# Altium PCB PCB_Rev1.1.PcbDoc (part 3 of 4)
Units mm, origin at the board's own origin, x right, y up, seen from the top; angles counter-clockwise.
Board outline 81.62 x 96.13 mm, 4 copper layers (Top Layer, GND, PWR, Bottom Layer), stack 1.49 mm thick; 185 components, 276 nets, 1052 pads, 353 vias.
Unrouted connection lines stored in the file: 133.
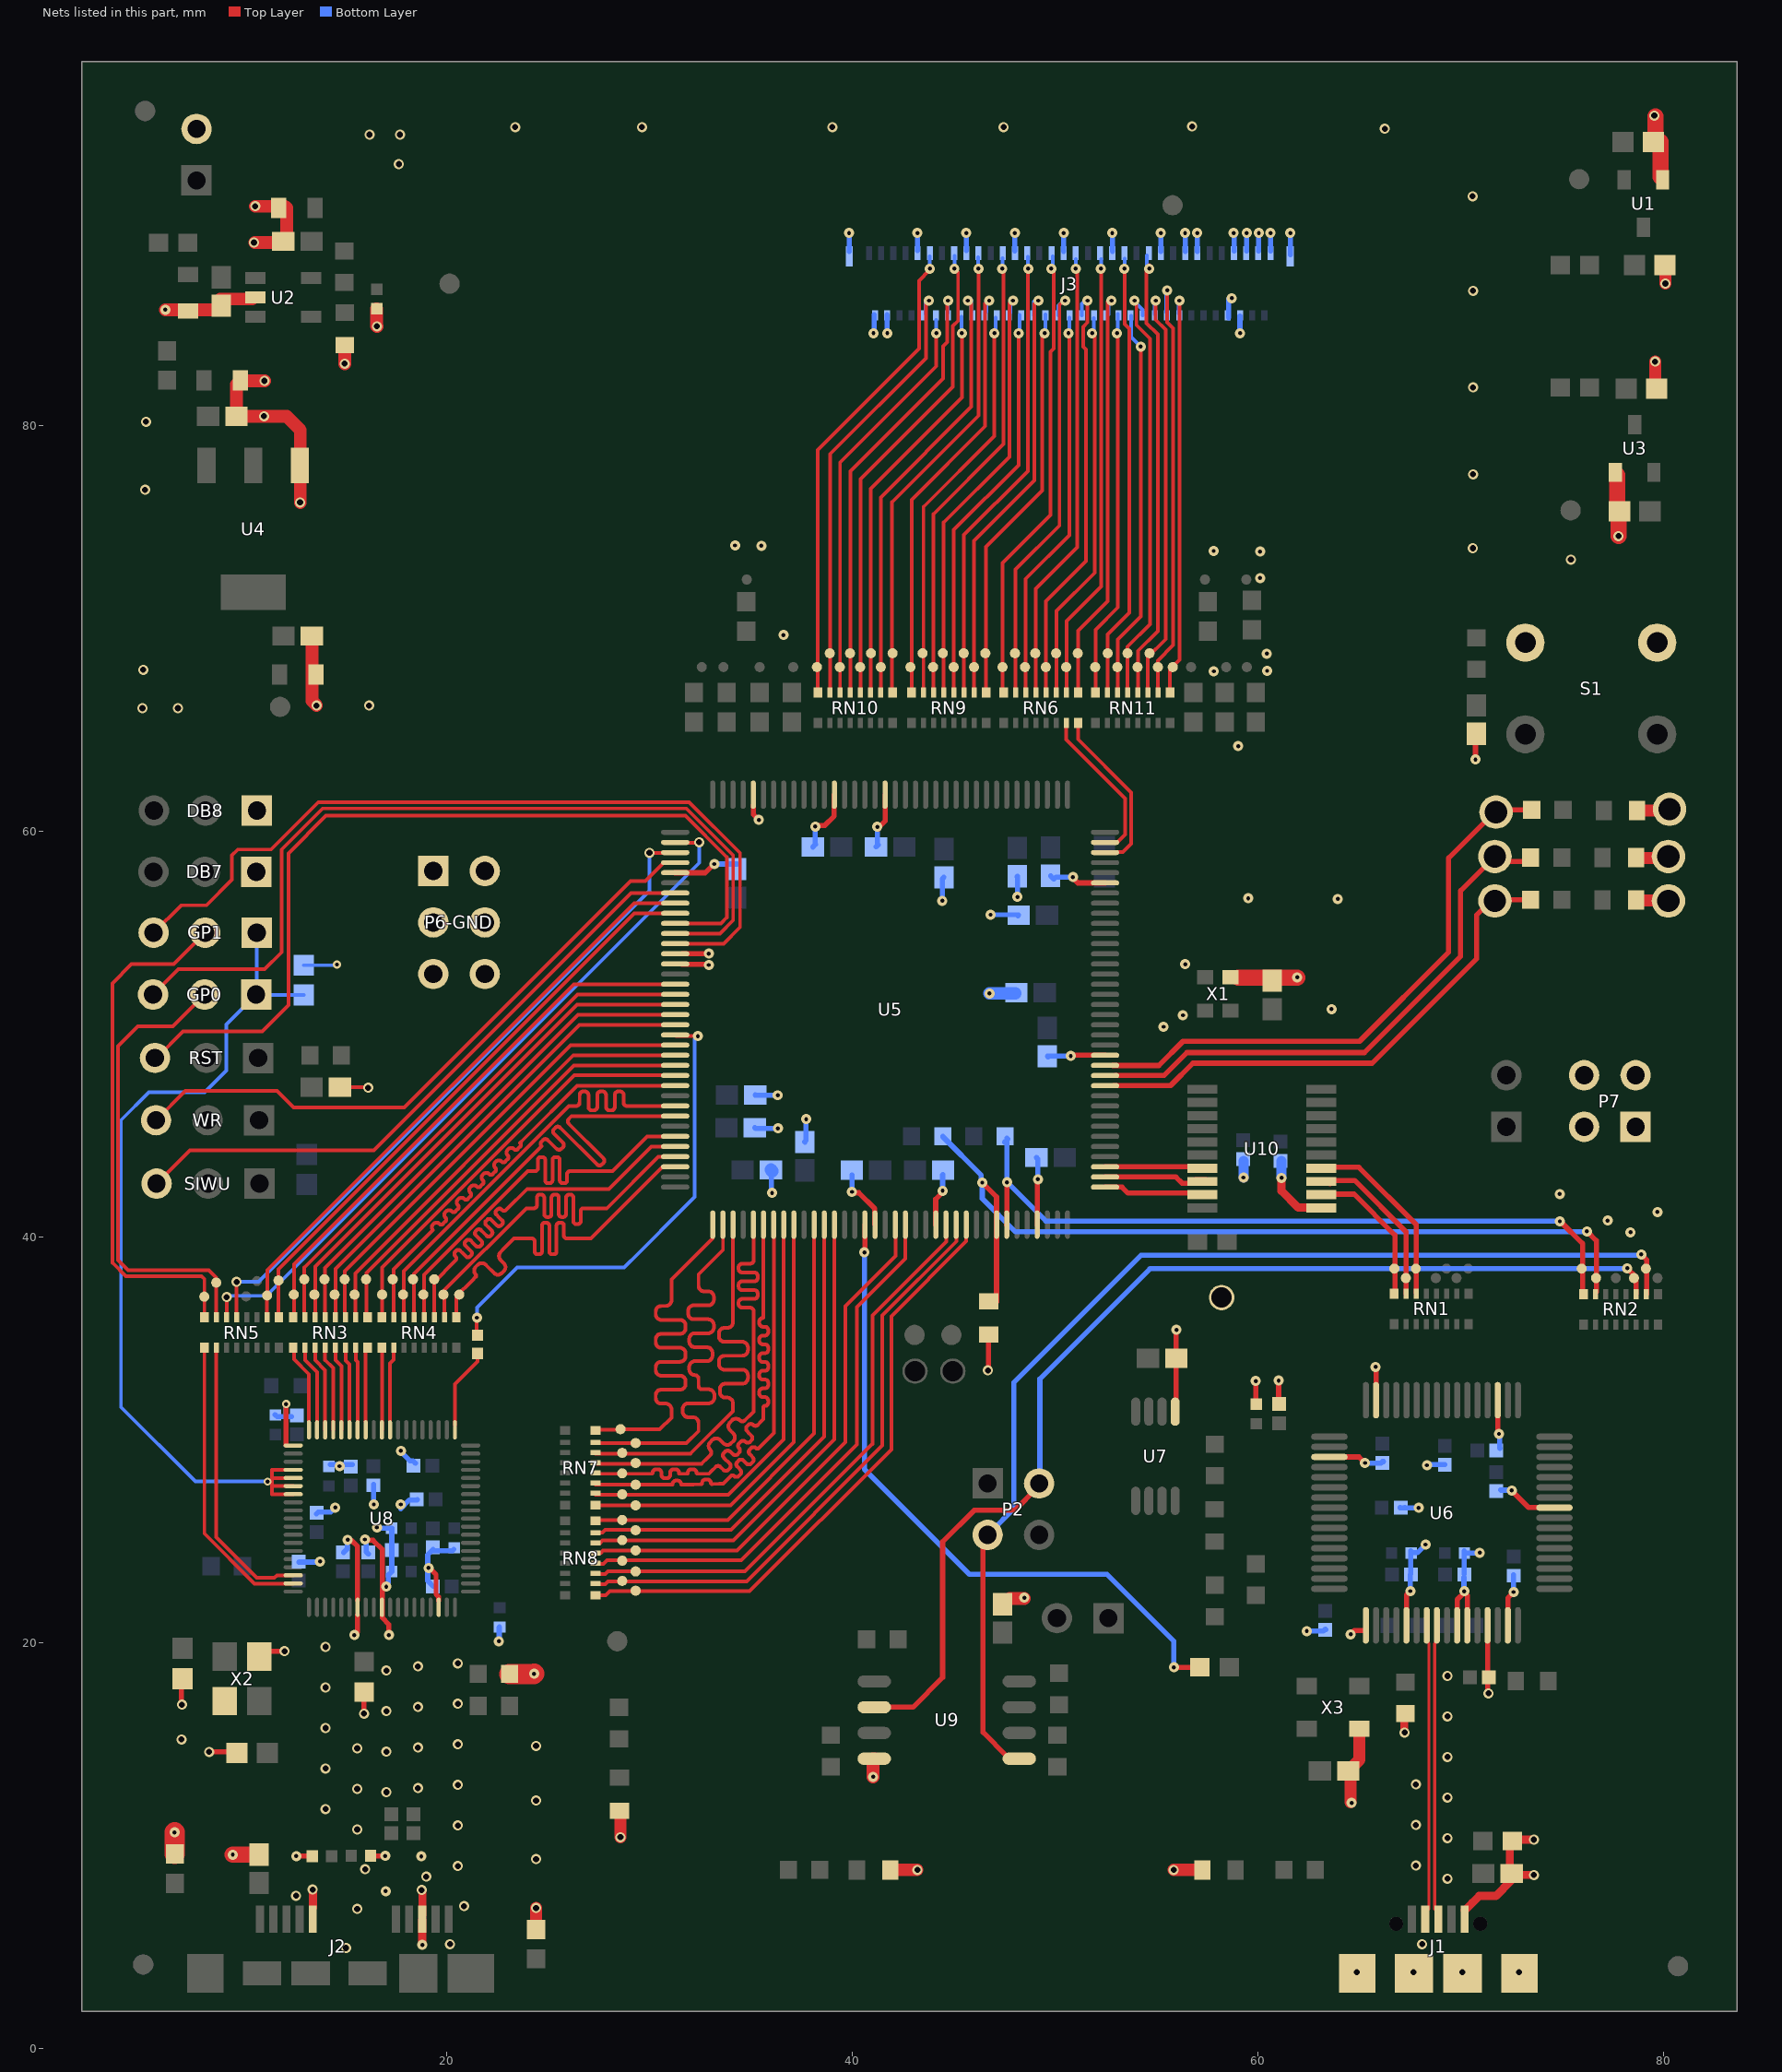
[diagram p4: the nets of this part, all layers, seen from the top]

## Via types
v1: diameter 0.5, hole 0.2, Top Layer to Bottom Layer, tented both sides, 238 vias
v2: diameter 0.5, hole 0.3, Top Layer to Bottom Layer, tented both sides, 106 vias
v3: diameter 0.4, hole 0.2, Top Layer to Bottom Layer, tented both sides, 5 vias
v4: diameter 0.6, hole 0.3, Top Layer to Bottom Layer, tented both sides, 2 vias
v5: diameter 1, hole 0.6, Top Layer to Bottom Layer, tented both sides, 1 vias
v6: diameter 0.3, hole 0.2, Top Layer to Bottom Layer, tented both sides, 1 vias

## Nets (pads, with @x,y where several pads share a name; then routed paths per layer and width w, separated by ;. In a path a pad name is that pad's centre, name@x,y a point inside that pad or via, vN(x,y) a via of type N, cw(c..) or ccw(c..) an arc to the next point about the centre after c; other vN are vias at no path point) (continued)
D22: RN4.2 U8.66 | length 4.1
  Top Layer w0.18: U8.66@17.188,30.486 17.188,33.766 17.373,33.951 RN4.2@17.373,34.529
D23: RN4.1 U8.67 | length 4
  Top Layer w0.18: U8.67@16.788,30.486 16.788,31.017 16.807,31.035 RN4.1@16.807,34.466
D24: RN3.8 U8.69 | length 3.6
  Top Layer w0.18: U8.69@15.976,30.907 RN3.8@15.976,34.462
D25: RN3.7 U8.70 | length 4.1
  Top Layer w0.18: RN3.7@15.5,34.529 15.5,33.928 15.588,33.84 U8.70@15.588,30.486
D26: RN3.6 U8.71 | length 4.1
  Top Layer w0.18: RN3.6@15,34.529 15,33.889 15.177,33.712 15.177,30.498 U8.71@15.188,30.486
D27: RN3.5 U8.72 | length 4.2
  Top Layer w0.18: RN3.5@14.5,34.529 14.5,33.916 14.788,33.628 U8.72@14.788,30.486
D28: RN3.4 U8.73 | length 4
  Top Layer w0.18: RN3.4@13.984,34.349 13.984,33.932 14.388,33.527 U8.73@14.388,30.486
D29: RN3.3 U8.74 | length 4.2
  Top Layer w0.18: RN3.3@13.5,34.529 13.5,33.916 13.988,33.428 U8.74@13.988,30.486
D30: RN3.2 U8.75 | length 4.3
  Top Layer w0.18: RN3.2@13,34.529 13,33.916 13.588,33.327 U8.75@13.588,30.486
D31: RN3.1 U8.76 | length 4.3
  Top Layer w0.18: RN3.1@12.457,34.466 12.457,33.959 13.188,33.228 U8.76@13.188,30.486
D\C\D\: U5.73 U10.9 | length 5.1
  Top Layer w0.254: U5.73@52.453,42.451 53.288,42.451 53.58,42.159 U10.9@57.432,42.159
D\S\R\: U5.74 U10.8 | length 5.2
  Top Layer w0.254: U5.74@52.453,42.951 55.946,42.951 56.256,42.641 56.751,42.641 56.92,42.809 U10.8@57.432,42.809
D\T\R\: U5.75 U10.7 | length 5
  Top Layer w0.254: U5.75@52.453,43.451 52.455,43.453 57.426,43.453 U10.7@57.432,43.459
D_N: J1.2 U6.7 | length 14.5
  Top Layer w0.15: J1.2@68.137,6.38 J1.2@68.137,6.385 ; J1.2@68.204,6.385 J1.2@68.204,6.86 ; U6.7@68.316,20.846 68.316,20.055 68.427,19.944 J1.2@68.427,6.848
D_P: J1.3 U6.8 | length 14.5
  Top Layer w0.15: J1.3@68.705,6.861 68.705,19.944 68.816,20.055 U6.8@68.816,20.846 ; J1.3@68.854,6.385 J1.3@68.854,6.86
DATA0: J3.57 pad.2@38.245,68.096 RN10.16 | length 23.9
  Top Layer w0.18: RN10.16@38.278,66.829 38.278,78.794 43.281,83.797 43.281,87.15 43.785,87.654 v1@43.785,87.896
  Bottom Layer w0.18: v1@43.805,87.784 J3.57@43.805,88.352
  other v1: 43.814,87.737
DATA1: J3.53 pad.2@40.376,68.096 RN10.12 | length 23.5
  Top Layer w0.18: RN10.12@40.394,66.829 40.394,77.361 44.951,81.918 44.951,84.911 45.203,85.162 45.203,87.567 v1@45.044,87.726
  Bottom Layer w0.18: v1@45.03,87.811 J3.53@45.03,88.379
  other v1: 45.022,87.737
DATA2: J3.49 pad.2@41.974,68.777 RN10.9 | length 23.2
  Top Layer w0.18: RN10.9@41.952,66.829 41.952,76.236 46.207,80.491 46.207,87.727 v1@46.204,87.73
  Bottom Layer w0.18: v1@46.197,87.731 J3.49@46.197,88.299
  other v1: 46.206,87.737
DATA3: J3.45 pad.2@43.973,68.096 RN9.14 | length 22.9
  Top Layer w0.18: RN9.14@43.998,66.829 43.998,75.641 47.425,79.068 ; 47.435,79.09 v1@47.435,87.718
  Bottom Layer w0.18: v1@47.397,87.684 J3.45@47.397,88.252
  other v1: 47.385,87.737
DATA4: J3.41 pad.2@45.481,68.777 RN9.11 | length 22.8
  Top Layer w0.18: RN9.11@45.498,66.829 45.498,74.609 48.649,77.76 v1@48.649,87.737
  Bottom Layer w0.18: v1@48.656,87.759 J3.41@48.656,88.327
  other v1: 48.662,87.737
DATA5: J3.37 pad.2@47.395,68.096 RN6.16 | length 22.5
  Top Layer w0.18: RN6.16@47.393,66.833 47.393,73.221 49.76,75.588 49.76,83.642 49.918,83.8 49.918,87.572 v1@49.805,87.685
  Bottom Layer w0.18: v1@49.875,87.783 J3.37@49.875,88.351
  other v1: 49.805,87.737
DATA6: J3.33 pad.2@49.013,68.777 RN6.13 | length 22.5
  Top Layer w0.18: RN6.13@49.037,66.833 49.037,71.948 51.089,74 51.089,87.786 v1@51,87.875
  Bottom Layer w0.18: v1@51.005,87.632 J3.33@51.005,88.2
  other v1: 51.005,87.737
DATA7: J3.29 pad.2@50.536,68.096 RN6.10 | length 22.1
  Top Layer w0.18: RN6.10@50.55,66.76 50.55,70.357 52.264,72.071 v1@52.264,87.632
  Bottom Layer w0.18: v1@52.265,87.632 J3.29@52.265,88.2
  other v1: 52.248,87.737
DATA7Res: RN6.7 U5.107 | length 7.3
  Top Layer w0.18: RN6.7@50.537,65.333 50.537,64.515 53.447,61.605 53.447,59.843 U5.107@53.037,59.433
DATA8: J3.25 pad.2@52.587,68.777 RN11.15 | length 22.2
  Top Layer w0.18: RN11.15@52.571,66.829 52.571,69.7 53.64,70.769 53.64,84.782 53.418,85.004 v1@53.418,87.899
  Bottom Layer w0.18: v1@53.423,87.656 J3.25@53.423,88.224
  other v1: 53.41,87.737
DATA9: J3.21 pad.2@54.052,68.096 RN11.12 | length 22.4
  Top Layer w0.18: RN11.12@54.071,66.829 54.071,68.891 55.053,69.873 55.053,84.499 54.494,85.058 54.494,87.618 54.637,87.761 v1@54.637,87.915
  Bottom Layer w0.18: v1@54.513,87.825 J3.21@54.513,88.393
  other v1: 54.637,87.737
DATA10: J3.16 pad.2@55.794,68.095 RN11.9 | length 20
  Top Layer w0.18: RN11.9@55.654,66.959 55.654,67.982 56.131,68.459 v1@56.131,86.151
  Bottom Layer w0.18: J3.16@56.085,85.534 v1@56.085,86.102
  other v1: 56.12,86.162
DATA11: J3.18 pad.2@55.057,68.096 RN11.10 | length 21.1
  Top Layer w0.18: RN11.10@55.051,66.959 55.051,68.414 55.815,69.178 55.815,84.806 55.518,85.103 v1(55.518,86.666)
  Bottom Layer w0.18: J3.18@55.463,85.586 v1@55.463,86.519
DATA12: J3.20 pad.2@54.646,68.777 RN11.11 | length 20.3
  Top Layer w0.18: RN11.11@54.562,66.936 54.562,68.589 55.439,69.466 55.439,84.735 54.955,85.219 v1@54.955,86.151
  Bottom Layer w0.18: J3.20@54.909,85.508 v1@54.909,86.076
  other v1: 54.955,86.162
DATA13: J3.22 pad.2@53.563,68.777 RN11.13 | length 20.9
  Top Layer w0.18: RN11.13@53.562,66.959 53.562,68.777 53.562,69.101 54.665,70.204 54.665,84.288 54.003,84.951 54.003,86.195 v1@53.902,86.296
  Bottom Layer w0.18: v1@53.969,86.058 54.31,85.717 J3.22@54.31,85.438
  other v1: 53.902,86.162
DATA14: J3.24 pad.2@53.065,68.096 RN11.14 | length 19.3
  Top Layer w0.18: RN11.14@53.071,66.829 53.071,69.444 54.211,70.584 v1(54.211,83.892)
  Bottom Layer w0.18: J3.24@53.742,85.425 53.742,84.361 v1(54.211,83.892)
DATA15: J3.26 pad.2@51.967,68.096 RN11.16 | length 19
  Top Layer w0.18: RN11.16@51.994,66.941 51.994,69.936 53.091,71.033 v1@53.091,84.555
  Bottom Layer w0.18: v1@53.074,84.555 J3.26@53.074,85.494
  other v1: 53.04,84.555
DATA16: J3.28 pad.2@51.108,68.777 RN6.9 | length 20.9
  Top Layer w0.18: RN6.9@51.133,66.8 51.133,69.888 52.58,71.335 52.58,86.109 v1@52.773,86.302
  Bottom Layer w0.18: J3.28@52.627,85.484 52.627,86.016 v1(52.773,86.162)
DATA16Res: RN6.8 U5.106 | length 8.1
  Top Layer w0.18: RN6.8@51.125,65.333 51.125,64.532 53.748,61.908 53.748,59.393 53.327,58.972 U5.106@52.849,58.972
DATA17: J3.30 pad.2@50.041,68.777 RN6.11 | length 19.3
  Top Layer w0.18: RN6.11@50.053,66.819 50.053,70.858 51.935,72.74 v1@51.935,84.555
  Bottom Layer w0.18: v1@51.904,84.555 J3.30@51.904,85.309
  other v1: 51.812,84.555
DATA18: J3.32 pad.2@49.53,68.096 RN6.12 | length 21.4
  Top Layer w0.18: RN6.12@49.537,66.833 49.537,71.339 51.52,73.322 51.52,83.748 51.371,83.897 51.371,84.871 51.583,85.083 v1@51.583,86.284
  Bottom Layer w0.18: J3.32@51.31,85.438 51.31,86.011 v1@51.583,86.284
  other v1: 51.583,86.162
DATA19: J3.34 pad.2@48.504,68.096 RN6.14 | length 19.4
  Top Layer w0.18: RN6.14@48.537,66.833 48.537,72.444 50.686,74.593 v1@50.686,84.555
  Bottom Layer w0.18: v1@50.693,84.555 J3.34@50.693,85.313
  other v1: 50.647,84.555
DATA20: J3.36 pad.2@48.013,68.777 RN6.15 | length 21.3
  Top Layer w0.18: RN6.15@48.037,66.833 48.037,72.905 50.205,75.073 50.205,85.958 v1@50.484,86.237
  Bottom Layer w0.18: J3.36@50.152,85.445 50.152,85.905 v1@50.484,86.237
  other v1: 50.484,86.162
DATA21: J3.38 pad.2@46.548,68.777 RN9.9 | length 19.9
  Top Layer w0.18: RN9.9@46.585,66.829 46.585,74.023 49.356,76.793 49.356,84.402 v1@49.509,84.555
  Bottom Layer w0.18: v1@49.508,84.555 J3.38@49.508,85.49
  other v1: 49.476,84.555
DATA22: J3.40 pad.2@45.995,68.096 RN9.10 | length 21.4
  Top Layer w0.18: RN9.10@45.998,66.829 45.998,74.326 48.968,77.296 48.968,86.012 v1@49.162,86.206
  Bottom Layer w0.18: J3.40@48.94,85.445 v1@48.94,86.124
  other v1: 49.162,86.162
DATA23: J3.42 pad.2@44.989,68.096 RN9.12 | length 19.9
  Top Layer w0.18: RN9.12@44.998,66.829 44.998,74.865 48.185,78.052 v1(48.185,84.555)
  Bottom Layer w0.18: v1@48.242,84.555 J3.42@48.242,85.45
DATA24: J3.44 pad.2@44.453,68.777 RN9.13 | length 21.4
  Top Layer w0.18: RN9.13@44.498,66.829 44.498,75.221 47.743,78.466 47.743,86.045 v1@47.91,86.212
  Bottom Layer w0.18: J3.44@47.779,85.575 v1@47.779,86.143
  other v1: 47.91,86.162
DATA25: J3.46 pad.2@43.453,68.777 RN9.15 | length 20
  Top Layer w0.18: RN9.15@43.498,66.829 43.498,75.991 46.993,79.486 v1(46.993,84.555)
  Bottom Layer w0.18: v1@47.047,84.533 J3.46@47.047,85.326
DATA26: J3.48 pad.2@42.855,68.096 RN9.16 | length 21.6
  Top Layer w0.18: RN9.16@42.911,66.829 42.911,76.343 46.544,79.977 46.544,86.034 v1@46.738,86.228
  Bottom Layer w0.18: J3.48@46.599,85.627 v1@46.599,86.195
  other v1: 46.738,86.162
DATA27: J3.50 pad.2@41.392,68.096 RN10.10 | length 21.7
  Top Layer w0.18: RN10.10@41.386,66.995 41.386,76.462 45.85,80.926 45.85,86.025 v1@45.69,86.185
  Bottom Layer w0.18: J3.50@45.842,85.621 v1@45.842,86.189
  other v1: 45.69,86.162
DATA28: J3.52 pad.2@40.907,68.777 RN10.11 | length 20.4
  Top Layer w0.18: RN10.11@40.898,66.829 40.898,76.894 45.393,81.389 v1(45.393,84.555)
  Bottom Layer w0.18: v1@45.38,84.559 J3.52@45.38,85.361
DATA29: J3.54 pad.2@39.879,68.777 RN10.13 | length 21.9
  Top Layer w0.18: RN10.13@39.889,66.829 39.889,77.756 44.463,82.33 44.463,83.903 44.67,84.11 44.67,86.109 v1@44.72,86.159
  Bottom Layer w0.18: J3.54@44.699,85.544 v1@44.699,86.112
  other v1: 44.709,86.162
DATA30: J3.56 pad.2@39.37,68.096 RN10.14 | length 20.2
  Top Layer w0.18: RN10.14@39.386,66.829 39.384,78.189 44.118,82.923 v1@44.118,84.523
  Bottom Layer w0.18: v1@44.134,84.641 J3.56@44.134,85.209
  other v1: 44.131,84.555
DATA31: J3.58 pad.2@38.879,68.777 RN10.15 | length 21.9
  Top Layer w0.18: RN10.15@38.887,66.829 38.887,78.603 43.615,83.331 43.615,85.997 v1@43.765,86.147
  Bottom Layer w0.18: J3.58@43.593,85.527 v1@43.593,86.095
  other v1: 43.765,86.162
DCDRN: pad.2@66.719,38.433 RN1.16 U10.12 | length 6.6
  Top Layer w0.254: U10.12@63.853,42.104 64.736,42.104 66.749,40.091 RN1.16@66.749,37.204
DSR_RN: pad.2@67.287,37.97 RN1.15 U10.13 | length 7.9
  Top Layer w0.254: U10.13@63.554,42.624 63.715,42.785 64.766,42.785 67.301,40.25 RN1.15@67.301,37.172
DTRRN: pad.2@67.78,38.433 RN1.14 U10.14 | length 8.7
  Top Layer w0.254: U10.14@63.681,43.432 64.972,43.432 67.8,40.604 RN1.14@67.8,37.236
FIFO_CLK: R4.2 U5.21 | length 23.5
  Top Layer w0.18: R4.2@21.467,35.18 v1@21.467,36.008 ; U5.21@31.253,49.939 31.294,49.898 v1(32.372,49.898)
  Top Layer w0.254: R4.2@21.461,35.174 R4.2@21.467,35.18 ; v1@21.467,36.008 v1(21.472,36.013)
  Bottom Layer w0.18: v1(21.472,36.013) 21.472,36.504 23.458,38.49 28.202,38.49 28.743,38.49 29.472,39.218 31.558,41.305 32.221,41.967 32.221,49.747 v1(32.372,49.898)
FIFO_D0: pad.2@29.302,22.551 RN8.9 U5.62 | length 29.6
  Top Layer w0.18: RN8.9@27.331,22.33 27.829,22.33 28.028,22.528 34.925,22.528 41.909,29.512 41.909,36.084 45.607,39.782 U5.62@45.607,40
FIFO_D1: pad.2@28.638,23.037 RN8.10 U5.61 | length 28.6
  Top Layer w0.18: RN8.10@27.548,22.881 27.804,22.881 27.931,23.008 34.776,23.008 41.474,29.706 41.474,36.131 45.118,39.775 U5.61@45.118,40.032
FIFO_D2: pad.2@29.302,23.501 RN8.11 U5.60 | length 27.9
  Top Layer w0.18: RN8.11@27.542,23.376 27.799,23.376 27.934,23.511 34.692,23.511 40.971,29.79 ; 40.977,29.783 40.977,36.118 44.616,39.757 U5.60@44.616,40.074
FIFO_D3: pad.2@28.638,24.032 RN8.12 U5.56 | length 26.5
  Top Layer w0.18: RN8.12@27.513,23.883 27.711,23.883 27.887,24.059 34.515,24.059 40.21,29.754 40.21,36.532 42.596,38.918 U5.56@42.596,40.139
FIFO_D4: pad.2@29.302,24.542 RN8.13 U5.55 | length 25.8
  Top Layer w0.18: RN8.13@27.331,24.417 27.587,24.417 27.694,24.524 34.297,24.524 39.64,29.867 39.64,36.578 42.117,39.055 U5.55@42.117,40.12
FIFO_D5: pad.2@28.638,25.046 RN8.14 U5.49 | length 24.3
  Top Layer w0.18: RN8.14@27.542,24.896 27.674,25.028 34.118,25.028 39.103,30.014 U5.49@39.103,40.601
FIFO_D6: pad.2@29.302,25.538 RN8.15 U5.48 | length 23.7
  Top Layer w0.18: RN8.15@27.331,25.417 27.667,25.417 27.801,25.551 34.012,25.551 38.603,30.142 U5.48@38.603,40.601
FIFO_D7: pad.2@28.638,26.042 RN8.16 U5.47 | length 22.8
  Top Layer w0.18: RN8.16@27.331,26.039 pad.2@28.638,26.042 33.847,26.042 38.103,30.298 U5.47@38.103,40.601
FIFO_D8: pad.2@29.302,26.763 RN7.9 U5.45 | length 21.6
  Top Layer w0.18: RN7.9@27.483,26.761 33.992,26.761 37.103,29.872 U5.45@37.103,40.601
FIFO_D9: pad.2@28.638,27.306 RN7.10 U5.44 | length 21
  Top Layer w0.18: RN7.10@27.331,27.293 33.877,27.293 36.603,30.019 U5.44@36.603,40.601
FIFO_D10: pad.2@29.302,27.777 RN7.11 U5.43 | length 22.1
  Top Layer w0.18: RN7.11@27.325,27.82 27.314,27.791 pad.2@29.285,27.787 ; pad.2@29.302,27.785 30.898,27.782 31.092,27.782 ccw(c31.092,27.805) 31.115,27.805 cw(c31.289,27.805) 31.289,27.979 31.375,27.979 cw(c31.375,27.805) 31.549,27.805 ccw(c31.572,27.805) 31.572,27.782 31.931,27.782 32.148,27.788 32.526,27.798 ccw(c32.524,27.854) 32.58,27.855 cw(c32.754,27.86) 32.749,28.033 32.836,28.035 cw(c32.841,27.862) 33.014,27.866 ccw(c33.07,27.868) 33.072,27.812 33.449,27.822 33.618,27.826 33.772,27.98 34.004,28.212 cw(c34.078,28.138) 34.153,28.212 ccw(c34.275,28.335) 34.398,28.212 34.46,28.274 ccw(c34.337,28.396) 34.46,28.519 34.385,28.593 34.317,28.662 cw(c34.439,28.785) 34.317,28.908 34.378,28.969 cw(c34.501,28.846) 34.623,28.969 34.692,28.9 34.766,28.826 ccw(c34.889,28.949) 35.012,28.826 35.073,28.887 ccw(c34.951,29.01) 35.073,29.133 34.999,29.207 34.93,29.276 cw(c35.053,29.399) 34.93,29.521 34.992,29.583 ; 34.992,29.583 cw(c35.115,29.46) 35.237,29.583 ; 35.237,29.583 ccw(c35.306,29.651) 35.375,29.583 35.613,29.821 35.668,29.876 36.126,30.334 36.126,40.578 U5.43@36.103,40.601
FIFO_D11: pad.2@28.638,28.342 RN7.12 U5.42 | length 25.4
  Top Layer w0.18: RN7.12@27.331,28.317 29.921,28.317 30.093,28.317 ccw(c30.093,28.362) 30.138,28.362 cw(c30.312,28.362) 30.312,28.535 30.398,28.535 cw(c30.398,28.362) 30.572,28.362 30.572,28.317 30.572,28.275 ccw(c30.746,28.275) 30.746,28.102 30.832,28.102 ccw(c30.832,28.275) 31.006,28.275 31.006,28.317 31.006,28.362 cw(c31.18,28.362) 31.18,28.535 31.266,28.535 cw(c31.266,28.362) 31.44,28.362 ccw(c31.485,28.362) 31.485,28.317 31.829,28.317 ccw(c31.829,28.362) 31.874,28.362 cw(c32.048,28.362) 32.048,28.535 32.134,28.535 cw(c32.134,28.362) 32.308,28.362 ccw(c32.353,28.362) 32.353,28.317 32.742,28.317 32.909,28.317 33.062,28.47 33.247,28.655 cw(c33.369,28.532) 33.492,28.655 33.632,28.514 ccw(c33.755,28.637) 33.878,28.514 33.939,28.576 ccw(c33.817,28.698) 33.939,28.821 33.676,29.084 33.657,29.104 cw(c33.779,29.227) 33.657,29.349 33.718,29.411 cw(c33.841,29.288) 33.964,29.411 33.983,29.391 34.091,29.283 ccw(c34.214,29.406) 34.337,29.283 34.398,29.344 ccw(c34.275,29.467) 34.398,29.59 cw(c34.506,29.698) 34.398,29.806 34.489,29.897 cw(c34.597,29.789) 34.705,29.897 ccw(c34.828,30.02) 34.95,29.897 35.012,29.958 ccw(c34.889,30.081) 35.012,30.204 34.904,30.312 34.798,30.417 cw(c34.921,30.54) 34.798,30.663 34.86,30.724 cw(c34.982,30.601) 35.105,30.724 ccw(c35.211,30.829) 35.316,30.724 35.518,30.926 35.603,31.011 35.603,31.228 35.603,31.594 cw(c35.671,31.594) 35.671,31.662 ccw(c35.671,31.836) 35.845,31.836 35.845,31.922 ccw(c35.671,31.922) 35.671,32.096 35.603,32.096 35.575,32.096 cw(c35.575,32.27) 35.402,32.27 35.402,32.356 cw(c35.575,32.356) 35.575,32.53 35.603,32.53 35.671,32.53 ccw(c35.671,32.704) 35.845,32.704 35.845,32.79 ccw(c35.671,32.79) 35.671,32.964 35.603,32.964 35.575,32.964 cw(c35.575,33.138) 35.402,33.138 35.402,33.224 cw(c35.575,33.224) 35.575,33.398 35.603,33.398 35.671,33.398 ccw(c35.671,33.572) 35.845,33.572 35.845,33.658 ccw(c35.671,33.658) 35.671,33.832 35.603,33.832 35.575,33.832 cw(c35.575,34.006) 35.402,34.006 35.402,34.092 cw(c35.575,34.092) 35.575,34.266 35.603,34.266 35.671,34.266 ccw(c35.671,34.44) 35.845,34.44 35.845,34.526 ccw(c35.671,34.526) 35.671,34.7 35.603,34.7 35.575,34.7 cw(c35.575,34.874) 35.402,34.874 35.402,34.96 cw(c35.575,34.96) 35.575,35.134 35.603,35.134 35.671,35.134 ccw(c35.671,35.308) 35.845,35.308 35.845,35.394 ccw(c35.671,35.394) 35.671,35.568 35.603,35.568 35.575,35.568 cw(c35.575,35.742) 35.402,35.742 35.402,35.828 cw(c35.575,35.828) 35.575,36.002 ccw(c35.575,36.03) 35.603,36.03 35.603,36.1 U5.42@35.603,40.601
FIFO_D12: pad.2@29.302,28.847 RN7.13 U5.41 | length 23.5
  Top Layer w0.18: RN7.13@27.331,28.817 32.557,28.817 32.866,29.126 32.983,29.243 ccw(c32.857,29.369) 32.983,29.496 cw(c33.178,29.69) 32.983,29.885 33.08,29.982 cw(c33.275,29.787) 33.469,29.982 33.596,29.856 33.628,29.823 ccw(c33.823,30.018) 34.017,29.823 34.115,29.921 ccw(c33.92,30.115) 34.115,30.31 34.082,30.342 33.956,30.469 cw(c34.151,30.663) 33.956,30.858 34.053,30.955 cw(c34.248,30.76) 34.442,30.955 ccw(c34.569,31.081) 34.695,30.955 35.055,31.315 35.12,31.38 35.12,31.724 35.12,31.858 35.12,36.284 35.12,36.333 ccw(c34.946,36.333) 34.946,36.507 34.555,36.507 cw(c34.555,36.681) 34.382,36.681 34.382,36.767 cw(c34.555,36.767) 34.555,36.941 35.12,36.941 35.148,36.941 ccw(c35.148,37.115) 35.321,37.115 35.321,37.201 ccw(c35.148,37.201) 35.148,37.375 35.12,37.375 34.555,37.375 cw(c34.555,37.549) 34.382,37.549 34.382,37.635 cw(c34.555,37.635) 34.555,37.809 35.12,37.809 35.148,37.809 ccw(c35.148,37.983) 35.321,37.983 35.321,38.069 ccw(c35.148,38.069) 35.148,38.243 35.12,38.243 34.555,38.243 cw(c34.555,38.417) 34.382,38.417 34.382,38.503 cw(c34.555,38.503) 34.555,38.677 34.946,38.677 ccw(c34.946,38.851) 35.12,38.851 35.12,39.111 35.12,39.328 U5.41@35.12,40.051
FIFO_D13: pad.2@28.638,29.347 RN7.14 U5.39 | length 21.8
  Top Layer w0.18: RN7.14@27.331,29.317 32.017,29.317 34.1,31.4 34.1,31.729 34.1,31.798 ccw(c33.825,31.798) 33.825,32.073 33.729,32.073 cw(c33.729,32.348) 33.454,32.348 33.454,32.486 cw(c33.729,32.486) 33.729,32.761 34.1,32.761 34.563,32.761 ccw(c34.563,33.036) 34.838,33.036 34.838,33.174 ccw(c34.563,33.174) 34.563,33.449 34.1,33.449 33.685,33.449 cw(c33.685,33.724) 33.41,33.724 33.41,33.862 cw(c33.685,33.862) 33.685,34.137 34.1,34.137 34.563,34.137 ccw(c34.563,34.412) 34.838,34.412 34.838,34.55 ccw(c34.563,34.55) 34.563,34.825 34.1,34.825 33.685,34.825 cw(c33.685,35.1) 33.41,35.1 33.41,35.238 cw(c33.685,35.238) 33.685,35.513 33.825,35.513 ccw(c33.825,35.788) 34.1,35.788 34.1,36.201 U5.39@34.1,39.992
FIFO_D14: pad.2@29.302,29.833 RN7.15 U5.38 | length 23.3
  Top Layer w0.18: RN7.15@27.531,29.829 27.535,29.825 31.803,29.825 32.405,30.427 32.405,30.76 32.405,30.829 ccw(c32.13,30.829) 32.13,31.104 31.9,31.104 cw(c31.9,31.379) 31.625,31.379 31.625,31.517 cw(c31.9,31.517) 31.9,31.792 32.405,31.792 32.91,31.792 ccw(c32.91,32.067) 33.185,32.067 33.185,32.205 ccw(c32.91,32.205) 32.91,32.48 32.574,32.48 cw(c32.574,32.649) 32.405,32.649 32.405,32.839 32.405,33 ccw(c32.222,33) 32.222,33.183 cw(c32.222,33.458) 31.947,33.458 31.947,33.596 cw(c32.222,33.596) 32.222,33.871 32.405,33.871 32.815,33.871 ccw(c32.815,34.146) 33.09,34.146 33.09,34.284 ccw(c32.815,34.284) 32.815,34.559 32.405,34.559 32.222,34.559 cw(c32.222,34.834) 31.947,34.834 31.947,34.972 cw(c32.222,34.972) 32.222,35.247 32.405,35.247 32.883,35.247 ccw(c32.883,35.522) 33.158,35.522 33.158,35.66 ccw(c32.883,35.66) 32.883,35.935 32.405,35.935 32.169,35.935 cw(c32.169,36.21) 31.893,36.21 31.893,36.348 cw(c32.169,36.348) 32.169,36.623 32.405,36.623 32.883,36.623 ccw(c32.883,36.898) 33.158,36.898 33.158,37.036 ccw(c32.883,37.036) 32.883,37.311 32.68,37.311 cw(c32.68,37.586) 32.405,37.586 32.405,37.627 32.405,38.14 33.61,39.345 U5.38@33.61,40.028
FIFO_D15: pad.2@28.559,30.519 RN7.16 U5.37 | length 22
  Top Layer w0.18: RN7.16@27.404,30.433 27.46,30.489 pad.2@28.559,30.489 ; pad.2@28.649,30.51 30.491,30.51 31.07,31.089 31.07,31.433 31.07,31.502 ccw(c30.795,31.502) 30.795,31.777 30.565,31.777 cw(c30.565,32.052) 30.29,32.052 30.29,32.19 cw(c30.565,32.19) 30.565,32.465 31.07,32.465 31.489,32.465 ccw(c31.489,32.74) 31.764,32.74 31.764,32.878 ccw(c31.489,32.878) 31.489,33.153 31.07,33.153 30.565,33.153 cw(c30.565,33.428) 30.29,33.428 30.29,33.566 cw(c30.565,33.566) 30.565,33.841 31.07,33.841 31.489,33.841 ccw(c31.489,34.116) 31.764,34.116 31.764,34.254 ccw(c31.489,34.254) 31.489,34.529 31.07,34.529 30.565,34.529 cw(c30.565,34.804) 30.29,34.804 30.29,34.942 cw(c30.565,34.942) 30.565,35.217 31.07,35.217 31.489,35.217 ccw(c31.489,35.492) 31.764,35.492 31.764,35.63 ccw(c31.489,35.63) 31.489,35.905 31.07,35.905 30.565,35.905 cw(c30.565,36.18) 30.29,36.18 30.29,36.318 cw(c30.565,36.318) 30.565,36.593 30.795,36.593 ccw(c30.795,36.868) 31.07,36.868 31.07,37.117 31.07,37.894 U5.37@33.093,39.917
FIFO_D16: pad.2@20.604,37.153 RN4.9 U5.34 | length 21.1
  Top Layer w0.18: RN4.9@20.461,36.029 20.461,37.073 21.229,37.841 21.42,38.032 ccw(c21.368,38.084) 21.42,38.137 cw(c21.615,38.331) 21.42,38.526 21.517,38.623 cw(c21.712,38.428) 21.906,38.623 21.959,38.571 22.316,38.214 ccw(c22.51,38.408) 22.705,38.214 22.802,38.311 ccw(c22.608,38.506) 22.802,38.7 22.64,38.863 cw(c22.834,39.057) 22.64,39.252 22.807,39.419 23.307,39.919 23.782,39.919 23.962,39.919 24.178,39.919 cw(c24.178,39.775) 24.322,39.775 24.322,39.283 ccw(c24.466,39.283) 24.466,39.139 24.538,39.139 ccw(c24.538,39.283) 24.682,39.283 24.682,39.919 24.682,40.555 cw(c24.826,40.555) 24.826,40.699 24.898,40.699 cw(c24.898,40.555) 25.042,40.555 25.042,39.919 25.042,39.283 ccw(c25.186,39.283) 25.186,39.139 25.258,39.139 ccw(c25.258,39.283) 25.402,39.283 25.402,39.919 25.402,40.555 cw(c25.546,40.555) 25.546,40.699 25.618,40.699 cw(c25.618,40.555) 25.762,40.555 25.762,40.063 ccw(c25.906,40.063) 25.906,39.919 25.986,39.919 27.101,39.919 U5.34@30.625,43.443
FIFO_D17: pad.2@19.821,37.153 RN4.10 U5.33 | length 21.9
  Top Layer w0.18: RN4.10@19.873,36.029 19.873,37.377 23.905,41.409 24.252,41.409 24.288,41.409 ccw(c24.288,41.553) 24.432,41.553 24.432,41.936 cw(c24.576,41.936) 24.576,42.08 24.648,42.08 cw(c24.648,41.936) 24.792,41.936 24.792,41.409 24.792,41.123 ccw(c24.936,41.123) 24.936,40.979 25.008,40.979 ccw(c25.008,41.123) 25.152,41.123 25.152,41.409 25.152,41.936 cw(c25.296,41.936) 25.296,42.08 25.368,42.08 cw(c25.368,41.936) 25.512,41.936 25.512,41.409 25.512,41.123 ccw(c25.656,41.123) 25.656,40.979 25.728,40.979 ccw(c25.728,41.123) 25.872,41.123 25.872,41.409 25.872,41.936 cw(c26.016,41.936) 26.016,42.08 26.088,42.08 cw(c26.088,41.936) 26.232,41.936 26.232,41.409 26.232,40.773 ccw(c26.376,40.773) 26.376,40.629 26.448,40.629 ccw(c26.448,40.773) 26.592,40.773 26.592,41.265 cw(c26.736,41.265) 26.736,41.409 26.768,41.409 27.882,41.409 30.424,43.951 U5.33@31.253,43.951
FIFO_D18: pad.2@19.369,37.907 RN4.11 U5.32 | length 21.3
  Top Layer w0.18: RN4.11@19.359,36.029 19.359,37.772 20.395,38.808 20.42,38.833 ccw(c20.319,38.935) 20.42,39.037 20.398,39.059 cw(c20.5,39.161) 20.398,39.263 20.449,39.314 cw(c20.551,39.212) 20.653,39.314 20.777,39.19 20.93,39.036 ccw(c21.032,39.138) 21.134,39.036 21.185,39.087 ccw(c21.083,39.189) 21.185,39.291 21.031,39.444 20.907,39.569 cw(c21.009,39.67) 20.907,39.772 20.958,39.823 cw(c21.06,39.721) 21.162,39.823 21.286,39.699 21.44,39.545 ccw(c21.541,39.647) 21.643,39.545 21.694,39.596 ccw(c21.592,39.698) 21.694,39.8 21.541,39.954 21.416,40.078 cw(c21.518,40.18) 21.416,40.281 21.467,40.332 cw(c21.569,40.23) 21.671,40.332 21.795,40.208 21.949,40.054 ccw(c22.05,40.156) 22.152,40.054 22.203,40.105 ccw(c22.101,40.207) 22.203,40.309 22.05,40.463 21.925,40.587 cw(c22.027,40.689) 21.925,40.79 21.976,40.841 cw(c22.078,40.74) 22.18,40.841 22.304,40.717 22.458,40.564 ccw(c22.56,40.665) 22.661,40.564 22.712,40.615 ccw(c22.61,40.716) 22.712,40.818 22.559,40.972 22.435,41.096 cw(c22.536,41.198) 22.435,41.3 22.485,41.351 cw(c22.587,41.249) 22.689,41.351 22.711,41.328 ccw(c22.813,41.43) 22.915,41.328 22.922,41.335 23.949,42.362 27.985,42.362 30.074,44.451 U5.32@31.253,44.451
FIFO_D19: pad.2@18.831,37.153 RN4.12 U5.31 | length 21.3
  Top Layer w0.18: RN4.12@18.873,36.029 18.873,38.137 23.978,43.241 24.301,43.241 24.337,43.241 ccw(c24.337,43.385) 24.481,43.385 24.481,43.787 cw(c24.625,43.787) 24.625,43.931 24.697,43.931 cw(c24.697,43.787) 24.841,43.787 24.841,43.241 24.841,42.788 ccw(c24.985,42.788) 24.985,42.644 25.057,42.644 ccw(c25.057,42.788) 25.201,42.788 25.201,43.241 25.201,43.787 cw(c25.345,43.787) 25.345,43.931 25.417,43.931 cw(c25.417,43.787) 25.561,43.787 25.561,43.241 25.561,42.788 ccw(c25.705,42.788) 25.705,42.644 25.777,42.644 ccw(c25.777,42.788) 25.921,42.788 25.921,43.097 cw(c26.065,43.097) 26.065,43.241 26.157,43.241 28.169,43.241 29.875,44.947 U5.31@30.706,44.947
FIFO_D20: pad.2@18.322,37.907 RN4.13 U5.29 | length 25.3
  Top Layer w0.18: RN4.13@18.359,36.029 18.359,38.168 24.506,44.315 24.66,44.469 cw(c24.776,44.585) 24.66,44.701 24.735,44.776 cw(c24.851,44.66) 24.967,44.776 25.398,44.344 ccw(c25.521,44.467) 25.644,44.344 25.705,44.406 ccw(c25.582,44.528) 25.705,44.651 25.274,45.083 cw(c25.39,45.199) 25.274,45.315 25.349,45.39 cw(c25.465,45.274) 25.581,45.39 27.397,43.573 ccw(c27.52,43.696) 27.642,43.573 27.704,43.635 ccw(c27.581,43.758) 27.704,43.88 26.01,45.574 cw(c26.133,45.696) 26.01,45.819 26.035,45.844 26.142,45.951 U5.29@31.253,45.951
FIFO_D21: pad.2@17.832,37.153 RN4.14 U5.28 | length 23.3
  Top Layer w0.18: RN4.14@17.873,36.029 17.873,37.153 17.873,38.312 23.988,44.427 26.012,46.451 26.322,46.451 26.365,46.451 ccw(c26.365,46.625) 26.539,46.625 26.539,46.995 cw(c26.713,46.995) 26.713,47.168 26.799,47.168 cw(c26.799,46.995) 26.973,46.995 26.973,46.451 26.973,46.406 ccw(c27.147,46.406) 27.147,46.233 27.233,46.233 ccw(c27.233,46.406) 27.407,46.406 27.407,46.451 27.407,46.995 cw(c27.581,46.995) 27.581,47.168 27.667,47.168 cw(c27.667,46.995) 27.841,46.995 27.841,46.451 27.841,46.406 ccw(c28.015,46.406) 28.015,46.233 28.101,46.233 ccw(c28.101,46.406) 28.275,46.406 28.275,46.451 28.275,46.995 cw(c28.449,46.995) 28.449,47.168 28.535,47.168 cw(c28.535,46.995) 28.709,46.995 28.709,46.625 ccw(c28.883,46.625) 28.883,46.451 28.889,46.451 U5.28@31.253,46.451
FIFO_D22: pad.2@17.321,37.907 RN4.15 U5.26 | length 22.6
  Top Layer w0.18: RN4.15@17.373,36.029 17.373,38.406 19.153,40.186 19.306,40.339 cw(c19.437,40.47) 19.306,40.6 19.353,40.646 cw(c19.483,40.516) 19.613,40.646 ccw(c19.711,40.744) 19.809,40.646 19.92,40.757 ccw(c19.822,40.855) 19.92,40.953 cw(c20.051,41.084) 19.92,41.214 19.966,41.26 cw(c20.097,41.13) 20.227,41.26 ccw(c20.325,41.358) 20.423,41.26 20.534,41.371 ccw(c20.436,41.469) 20.534,41.567 cw(c20.664,41.697) 20.534,41.828 20.58,41.874 cw(c20.71,41.743) 20.841,41.874 ccw(c20.939,41.972) 21.037,41.874 21.148,41.985 ccw(c21.05,42.083) 21.148,42.181 cw(c21.278,42.311) 21.148,42.442 21.194,42.488 cw(c21.324,42.357) 21.455,42.488 ccw(c21.553,42.586) 21.65,42.488 21.762,42.599 ccw(c21.664,42.697) 21.762,42.795 cw(c21.892,42.925) 21.762,43.055 21.808,43.101 cw(c21.938,42.971) 22.068,43.101 ccw(c22.166,43.199) 22.264,43.101 22.375,43.212 ccw(c22.277,43.31) 22.375,43.408 cw(c22.506,43.539) 22.375,43.669 22.421,43.715 cw(c22.552,43.585) 22.682,43.715 ccw(c22.78,43.813) 22.878,43.715 22.989,43.826 ccw(c22.891,43.924) 22.989,44.022 cw(c23.119,44.152) 22.989,44.283 23.035,44.329 cw(c23.166,44.199) 23.296,44.329 ccw(c23.394,44.427) 23.492,44.329 23.603,44.44 ccw(c23.505,44.538) 23.603,44.636 23.789,44.822 26.417,47.45 U5.26@31.253,47.45
FIFO_D23: pad.2@16.801,37.153 RN4.16 U5.25 | length 20.1
  Top Layer w0.18: RN4.16@16.807,36.165 16.807,37.22 16.807,38.498 26.272,47.964 U5.25@30.609,47.964
FIFO_D24: pad.2@16.009,37.907 RN3.9 U5.24 | length 21.5
  Top Layer w0.18: RN3.9@16.023,36.158 16.023,38.218 26.256,48.451 U5.24@31.253,48.451
FIFO_D25: pad.2@15.441,37.153 RN3.10 U5.23 | length 22.2
  Top Layer w0.18: RN3.10@15.475,36.24 15.475,38.205 26.221,48.951 U5.23@31.253,48.951
FIFO_D26: pad.2@14.949,37.907 RN3.11 U5.22 | length 22.6
  Top Layer w0.18: RN3.11@14.956,36.165 14.956,38.318 26.093,49.454 U5.22@30.835,49.454
FIFO_D27: pad.2@14.452,37.153 RN3.12 U5.20 | length 24.1
  Top Layer w0.18: RN3.12@14.5,36.029 14.5,38.414 26.537,50.451 U5.20@31.253,50.451
FIFO_D28: pad.2@13.954,37.907 RN3.13 U5.19 | length 24.7
  Top Layer w0.18: RN3.13@13.979,36.199 13.979,38.47 26.46,50.951 U5.19@31.253,50.951
FIFO_D29: pad.2@13.457,37.153 RN3.14 U5.18 | length 25.6
  Top Layer w0.18: RN3.14@13.5,36.029 13.5,37.153 13.5,38.534 26.417,51.451 U5.18@31.253,51.451
FIFO_D30: pad.2@12.96,37.907 RN3.15 U5.17 | length 25.5
  Top Layer w0.18: RN3.15@12.967,36.199 12.967,38.484 26.431,51.948 U5.17@30.584,51.948
FIFO_D31: pad.2@12.443,37.153 RN3.16 U5.16 | length 27
  Top Layer w0.18: RN3.16@12.457,36.165 12.457,37.153 12.457,38.655 26.253,52.451 U5.16@31.253,52.451
FLASH_MISO: P2.2 pad.2@78.536,37.97 RN2.11 U9.2 | length 54.1
  Top Layer w0.254: U9.2@41.072,16.809 42.98,16.809 44.443,18.272 44.443,24.963 46.003,26.523 48.011,26.523 P2.2@49.134,27.646 ; v1(78.207,38.448) 78.65,38.005 RN2.11@78.65,37.181
  Bottom Layer w0.254: P2.2@49.239,28.081 49.239,32.993 54.674,38.428 76.334,38.428 v1@78.207,38.428
FLASH_MOSI: P2.3 pad.2@79.13,38.433 RN2.10 U9.5 | length 54.9
  Top Layer w0.254: P2.3@46.661,25.302 46.439,25.08 46.439,15.571 U9.5@47.632,14.378 ; v1(78.899,39.132) 79.173,38.858 RN2.10@79.173,37.181
  Bottom Layer w0.254: P2.3@46.846,25.486 47.951,26.591 47.951,32.812 54.224,39.085 76.014,39.085 v1@78.899,39.085
FT_CLK: R4.1 U8.58 | length 3.8
  Top Layer w0.18: U8.58@20.389,30.716 20.389,32.736 21.507,33.854 R4.1@21.507,34.06
FT_GPIO0: GP0.3 U5.11 | length 42.9
  Top Layer w0.18: GP0.3@5.765,51.949 GP0.3@5.503,51.949 6.754,53.2 11.008,53.2 11.838,54.03 11.838,59.099 13.861,61.122 31.811,61.122 34.11,58.823 34.11,55.606 33.455,54.951 U5.11@31.253,54.951
FT_GPIO1: GP1.3 U5.12 | length 40.6
  Top Layer w0.18: GP1.3@5.595,54.996 GP1.3@5.529,54.996 6.879,56.346 6.879,56.348 8.141,56.348 9.395,57.602 9.395,58.81 9.684,59.099 11.313,59.099 13.651,61.437 31.943,61.437 34.451,58.929 34.451,55.265 33.637,54.451 U5.12@31.253,54.451
FT_OE: RN5.14 U5.2 | length 35
  Top Layer w0.18: RN5.14@9.122,36.029 9.135,36.042 v2(9.135,37.027) ; U5.2@31.577,59.437 v2@32.361,59.437
  Bottom Layer w0.18: v2(9.135,37.027) 9.2,37.092 11.088,37.092 32.435,58.439 v2(32.435,59.456)
FT_RD: RN5.13 U5.3 | length 33
  Top Layer w0.112: U5.3@31.253,58.951 U5.3@31.259,58.946
  Top Layer w0.18: v2(9.619,37.78) 9.619,36.032 RN5.13@9.622,36.029 ; v2(29.986,58.932) U5.3@31.051,58.932
  Bottom Layer w0.18: v2(9.619,37.78) 10.701,37.78 29.986,57.065 v2(29.986,58.932)
FT_RESET: RST.3 U5.10 | length 44
  Top Layer w0.18: RST.3@5.597,48.823 5.676,48.823 6.987,50.134 10.883,50.134 12.179,51.43 12.179,58.915 14.03,60.766 31.75,60.766 33.793,58.723 33.793,55.739 33.505,55.451 U5.10@31.253,55.451
FT_RXF: pad.2@11.126,37.108 RN5.10 U5.8 | length 29.9
  Top Layer w0.18: RN5.10@11.122,36.029 11.126,36.033 pad.2@11.126,37.108 11.146,37.128 11.146,38.366 29.231,56.451 U5.8@31.253,56.451
FT_SIWU: SIWU.3 U5.7 | length 30.9
  Top Layer w0.18: SIWU.3@5.675,42.625 7.32,44.27 16.389,44.27 19.361,47.242 29.076,56.957 U5.7@30.629,56.957
FT_TXE: pad.2@11.691,37.848 RN5.9 U5.9 | length 29.2
  Top Layer w0.18: RN5.9@11.709,36.029 11.691,36.047 pad.2@11.691,37.848 11.69,37.849 11.69,38.399 29.242,55.951 U5.9@31.253,55.951
FT_WR: U5.4 WR.3 | length 31.5
  Top Layer w0.18: WR.3@5.649,45.751 7.1,47.202 11.614,47.202 12.435,46.381 17.881,46.381 19.117,47.617 29.05,57.55 29.784,57.55 30.685,58.451 U5.4@31.253,58.451
GND: C1.2 C2.1 C3.1 C4.2 C5.1 C6.1 C7.1 C8.1 C9.2 C10.1 C11.2 C12.1 C13.1 C14.1 C15.1 C16.1 C17.1 C18.1 C19.1 C20.1 C21.1 C22.1 C25.2 C26.1 C27.2 C28.2 C29.2 C30.2 C31.2 C32.2 C33.2 C34.2 C35.2 C36.2 C37.2 C38.2 C39.2 C40.2 C41.2 C42.2 C43.2 C44.2 C45.1 C46.1 C47.2 C48.2 C49.1 C50.2 C51.2 C52.1 C53.1 C54.2 C55.2 C56.2 C57.2 C58.2 C59.1 C60.1 C61.1 C62.2 C63.1 C64.2 C65.2 C66.2 C67.1 C68.1 C69.2 C70.2 C71.2 C72.1 C74.1 C75.1 C76.1 D1.1 D2.1 DB7.1 DB8.1 J1.5 J1.Shell J2.5 J2.8 J3.1 J3.3 J3.5 J3.6 J3.7 J3.8 J3.13 J3.15 J3.19 J3.27 J3.35 J3.43 J3.51 J3.59 J3.64 J3.66 J3.68 J3.69 LED1.2 LED2.2 LED3.2 LED4.2 LED5.2 LED6.2 LED7.2 P1.2 P6-GND.1 P6-GND.2 P6-GND.3 P6-GND.4 P6-GND.5 P6-GND.6 P7.1 P7.2 P7.3 P7.4 pad.1@58.202,37.005 pad.1@80.239,56.563 pad.1@80.239,58.755 pad.1@80.293,61.086 R2.1 R9.1 R10.1 R12.1 R16.2 R30.2 R31.2 R49.1 S1.1 S1.2 U1.1 U2.2 U3.1 U4.1 U5.5 U5.13 U5.14 U5.53 U5.59 U5.69 U5.86 U5.103 U5.127 U5.132 U5.140 U6.1 U6.5 U6.10 U6.11 U6.13 U6.15 U6.25 U6.35 U6.47 U6.51 U7.5 U8.1 U8.26 U8.29 U8.36 U9.4 U10.11 X1.2 X2.2 X2.4 X3.3 | length 202.5
  Top Layer w0.18: C59.1@14.721,47.379 v2@16.087,47.379
  Top Layer w0.245: C5.1@8.712,85.754 C5.1@8.868,85.91 ; U8.1@12.061,29.728 v3@12.061,31.756 ; v1(12.565,9.465) D2.1@13.327,9.465 ; v1@16.1,25.04 16.352,25.04 16.811,24.581 U8.29@16.811,21.759 ; D1.1@16.267,9.478 v1(16.952,9.478) ; U8.29@16.811,21.713 16.811,21.212 17.126,20.897 v1@17.126,20.378 ; v1@19.11,23.694 19.461,23.343 19.461,22.372 19.582,22.25 U8.36@19.582,22.074 ; U7.5@55.96,31.766 v1@55.96,35.412 ; v2(79.544,95.286) v2@79.593,95.237 ; U1.1@79.797,92.287 U1.1@79.956,92.128
  Top Layer w0.254: v2@6.904,16.933 6.904,18.185 C18.1@6.962,18.245 ; v2(8.266,14.607) 9.668,14.607 C20.1@9.676,14.614 ; X2.2@10.895,19.232 11.235,19.57 v2(11.99,19.57) ; v1@15.059,25.043 15.277,25.043 15.588,24.732 U8.26@15.588,22.084 ; v1(15.426,20.365) 15.584,20.523 U8.26@15.584,21.351 ; v2(15.908,16.496) R10.1@15.908,17.543 ; U5.5@31.253,57.951 32.727,57.951 33.159,58.383 v1(33.187,58.383) ; U5.14@31.577,53.436 v1@32.99,53.436 ; U5.13@31.6,53.964 v1@33.013,53.964 ; U5.140@35.106,61.286 35.106,60.833 v1(35.378,60.561) ; v1@38.163,60.286 38.632,60.286 39.094,60.748 39.094,61.792 U5.132@39.103,61.801 ; v1(39.97,42.22) 40.018,42.173 40.309,42.173 41.094,41.389 41.094,40.61 U5.53@41.103,40.601 ; v1@41.267,60.102 41.267,60.169 41.603,60.505 U5.127@41.603,61.801 ; U5.59@44.103,40.601 44.103,41.864 44.444,42.205 v1(44.444,42.271) ; v2@46.695,33.412 LED5.2@46.695,35.215 ; U5.69@49.105,40.576 v1@49.105,42.652 ; v1@50.742,48.86 50.809,48.86 50.899,48.951 U5.86@52.453,48.951 ; v1@50.855,57.646 50.922,57.646 51.117,57.451 U5.103@52.453,57.451 ; v1(59.889,32.888) 59.898,32.879 59.898,31.757 C17.1@59.908,31.747 ; v1(61.014,32.912) 61.014,31.734 C16.1@61.036,31.712 ; U6.51@63.516,29.146 64.978,29.146 v1(65.272,28.852) ; v1(64.569,20.403) 64.754,20.588 65.295,20.588 65.316,20.609 U6.1@65.316,20.846 ; U6.47@65.816,31.946 v1@65.816,33.568 ; R12.1@67.211,16.572 R12.1@67.256,16.616 ; U6.5@67.316,20.846 67.316,22.337 v1(67.509,22.53) ; U6.10@69.816,20.846 69.825,20.855 69.825,22.117 v1@70.168,22.46 ; v1(70.168,22.526) v1@70.168,22.46 ; U6.11@70.316,20.846 70.316,22.312 v1@70.168,22.46 ; v1(70.721,63.533) 70.721,64.768 C74.1@70.759,64.806 ; U6.13@71.316,20.846 71.325,20.837 v2@71.325,17.491 ; v1@71.816,30.293 U6.35@71.816,31.946 ; U6.15@72.316,20.846 72.316,22.184 72.615,22.484 v1@72.615,22.55 ; v1(72.507,27.494) 73.346,26.655 74.607,26.655 U6.25@74.616,26.646 ; C25.2@72.511,8.606 C25.2@72.578,8.539 ; R16.2@72.536,10.207 R16.2@72.61,10.281
  Top Layer w0.4: J2.5@13.382,6.927 v2@13.382,7.814 ; v1(18.782,5.087) J2.8@18.782,6.334 ; J2.8@18.79,6.547 v2@18.79,7.794 ; v1(61.154,42.906) 61.154,42.268 61.98,41.442 U10.11@62.784,41.442 ; v2@67.211,15.558 R12.1@67.211,16.572 ; J1.5@70.205,6.804 70.561,7.16 70.901,7.5 71.726,7.5 C25.2@72.466,8.24 ; C25.2@72.42,8.606 R16.2@72.42,9.775 ; C25.2@72.578,8.539 v2(73.603,8.539) ; R16.2@72.61,10.281 v2(73.601,10.281)
  Top Layer w0.6: R31.2@24.391,5.852 v2(24.391,6.906) ; v2(28.55,10.404) LED6.2@28.55,11.735 ; LED1.2@41.866,8.787 v2(43.197,8.787) ; v2(55.84,8.787) LED7.2@57.208,8.787 ; C22.1@64.448,13.67 64.995,14.217 X3.3@64.995,15.748 ; v1@64.566,12.125 C22.1@64.566,13.333 ; LED4.2@78.574,56.581 pad.1@80.585,56.581 ; LED3.2@78.609,58.68 79.953,58.68 pad.1@80.23,58.957 ; LED2.2@78.649,61.019 pad.1@79.98,61.019 ; C1.2@79.488,93.98 C1.2@79.513,93.98 ; C9.2@79.582,81.819 v2(79.582,83.157) ; C4.2@80.071,87.92 80.089,87.902 v2(80.089,87.006)
  Top Layer w0.635: v1(6.106,85.718) 8.676,85.718 C5.1@8.712,85.754 ; C5.1@8.78,86.183 8.817,86.243 U2.2@10.378,86.243 ; C10.1@9.617,80.458 C10.1@9.617,80.461 ; v2@10.517,89.028 C3.1@11.981,89.028 ; v2(10.543,90.812) 12.007,90.812 12.083,90.736 C3.1@12.083,89.085 ; v2(10.994,82.208) 9.955,82.208 9.872,82.291 C8.1@9.817,82.236 9.617,82.036 C10.1@9.617,80.461 ; v2@12.764,76.212 12.764,79.785 12.088,80.461 v2(10.975,80.461) C10.1@9.617,80.461 ; C12.1@13.335,69.625 13.335,66.423 v2(13.56,66.198) ; v2(14.952,83.052) R2.1@14.952,83.973 ; C7.1@16.536,85.762 16.536,84.908 v2(16.545,84.899) ; v1(41.015,13.38) 41.015,14.252 41.033,14.269 U9.4@41.072,14.269 ; C21.1@47.763,22.17 v1@48.467,22.17
  Top Layer w0.8: v1(9.435,9.536) C26.1@10.686,9.536 ; X1.2@59.02,52.778 v1@61.935,52.778 ; C11.2@77.704,75.843 U3.1@77.704,77.561 ; v2(77.776,74.553) C11.2@77.776,75.81 ; C1.2@79.593,93.98 v2@79.593,95.237 ; U1.1@79.842,92.269 C1.2@79.842,93.987
  Top Layer w1: v1(6.56,10.638) 6.579,10.619 R30.2@6.579,9.57 ; R9.1@23.083,18.45 24.288,18.45 v1(24.298,18.46)
  Bottom Layer w0.18: R49.1@12.935,53.393 14.536,53.393 v3(14.569,53.426)
  Bottom Layer w0.245: 11.996,31.146 12.057,31.207 v3@12.057,31.756 ; C47.2@14.244,28.765 C48.2@15.341,28.765 ; C51.2@16.369,27.789 16.379,27.78 16.379,26.816 v1(16.388,26.806) ; v1@17.726,29.396 18.163,28.959 18.313,28.959 C50.2@18.439,28.833 ; C56.2@19.255,24.525 20.267,24.525 C57.2@20.342,24.6 ; v1(46.808,55.883) 48.093,55.883 48.094,55.884 48.153,55.825 C33.2@48.191,55.863 ; v1(48.131,56.762) 48.131,57.733 48.107,57.757 C31.2@48.133,57.783 ; C30.2@49.765,57.799 49.93,57.634 50.036,57.74 v1(50.868,57.74)
  Bottom Layer w0.254: C43.2@11.516,31.236 C43.2@11.539,31.213 ; C43.2@11.626,31.139 11.633,31.146 11.996,31.146 C44.2@12.332,31.146 ; C66.2@12.694,23.949 12.708,23.963 13.516,23.963 v1@13.53,23.977 ; C55.2@13.562,26.348 13.643,26.428 14.256,26.428 v1(14.485,26.657) ; C65.2@14.898,24.438 15.081,24.62 v1@15.081,25.007 ; v1@15.958,25.128 16.005,25.081 16.005,24.476 C64.2@16.126,24.355 ; v1@16.444,25.652 16.453,25.643 17.259,25.643 C58.2@17.268,25.634 ; v1@16.954,22.72 16.954,22.787 17.114,22.947 17.114,23.341 C69.2@17.267,23.494 ; C69.2@17.275,23.494 C58.2@17.275,25.634 ; v1@17.714,26.591 18.148,27.025 18.52,27.025 C54.2@18.541,27.046 ; C56.2@19.305,24.578 19.049,24.322 19.049,23.043 C70.2@19.33,22.762 ; v1(22.553,20.061) 22.572,20.081 22.572,20.738 C71.2@22.592,20.758 ; v1(33.187,58.383) 34.298,58.383 C32.2@34.304,58.389 ; C37.2@35.175,45.38 35.212,45.343 35.216,45.347 v1(36.324,45.347) ; C36.2@35.205,46.991 35.22,46.977 35.226,46.982 v1(36.308,46.982) ; v1@36.006,42.261 C42.2@36.006,43.211 ; C38.2@37.649,44.674 37.637,44.686 37.711,44.76 v1(37.711,45.801) ; C29.2@38.041,59.222 38.174,59.355 38.162,59.366 v1(38.162,60.235) ; J3.69@39.83,88.587 v1@39.83,89.504 ; v1(39.97,42.22) 39.97,43.056 C41.2@39.973,43.058 ; v1@41.058,84.545 J3.66@41.058,85.462 ; C28.2@41.16,59.229 41.262,59.331 41.218,59.376 v1(41.218,60.221) ; v1@41.711,84.541 J3.64@41.711,85.458 ; J3.59@43.205,88.628 v1@43.205,89.545 ; v1(44.422,56.571) 44.422,57.642 C27.2@44.506,57.726 ; v1(44.444,42.271) 44.444,43.057 C40.2@44.454,43.067 ; J3.51@45.613,88.636 v1@45.613,89.553 ; J3.43@48.005,88.62 v1@48.005,89.537 ; C34.2@48.033,52.003 C34.2@48.077,52.047 ; C39.2@49.07,43.911 49.139,43.842 v1(49.139,42.844) ; C35.2@49.606,48.903 49.641,48.868 49.695,48.922 v1(50.762,48.922) ; J3.35@50.413,88.594 v1@50.413,89.511 ; J3.27@52.813,88.594 v1@52.813,89.511 ; J3.19@55.204,88.586 v1@55.204,89.503 ; J3.15@56.404,88.586 v1@56.404,89.503 ; J3.13@57.001,88.589 v1@57.001,89.5 ; J3.8@58.545,85.321 v1@58.545,86.238 ; J3.7@58.813,88.609 v1@58.813,89.524 ; v1@59.107,84.489 J3.6@59.107,85.406 ; J3.5@59.432,88.597 v1@59.432,89.534 ; J3.3@60.033,88.598 v1@60.033,89.539 ; J3.1@60.62,88.601 v1@60.62,89.536 ; J3.68@61.593,88.432 v1@61.593,89.513 ; v1(62.403,20.559) 63.212,20.559 63.315,20.662 C72.1@63.352,20.625 ; v1(65.272,28.852) 65.286,28.838 66.052,28.838 66.133,28.919 C45.1@66.196,28.919 ; C53.1@66.996,26.65 67.006,26.64 v1(67.921,26.64) ; C53.1@67.22,26.641 C53.1@67.226,26.647 ; C68.1@67.5,23.35 67.505,23.346 67.505,22.535 v1(67.509,22.53) ; C68.1@67.53,23.383 C60.1@67.53,24.52 ; C60.1@67.548,24.413 67.559,24.424 67.856,24.424 v1(68.26,24.828) ; v1(68.326,28.739) 68.356,28.768 C46.1@69.21,28.768 ; C67.1@70.156,23.373 C61.1@70.156,24.51 ; C67.1@70.162,23.208 70.153,23.199 70.153,22.542 v1(70.168,22.526) ; C61.1@70.162,24.345 C61.1@70.186,24.37 ; C61.1@70.173,24.408 70.18,24.416 70.925,24.416 v1(70.932,24.423) ; v1@71.914,30.127 71.921,30.121 71.921,29.587 C49.1@71.927,29.581 ; C52.1@71.957,27.529 71.975,27.511 72.489,27.511 v1(72.507,27.494) ; C63.1@72.6,23.334 72.603,23.331 72.603,22.669 v1@72.607,22.665
  Bottom Layer w0.5: v1(59.282,42.922) C76.1@59.282,43.739 ; v1@61.153,42.928 C75.1@61.153,43.745
  Bottom Layer w0.6: v1(46.751,52.003) C34.2@48.033,52.003
  Bottom Layer w0.635: C42.2@35.974,43.3 C42.2@36.029,43.245
  other v1: 16.974,7.743 18.731,9.456 64.612,12.088 17.136,20.365 48.469,22.207 72.6,22.485 17.003,22.754 19.091,23.675 13.735,23.99 15.097,25.059 15.95,25.08 16.546,25.669 17.714,26.806 14.703,28.694 17.726,29.45 71.883,30.283 65.793,33.591 55.979,35.412 78.365,40.226 77.242,40.799 79.692,41.229 74.877,42.113 36.029,42.164 55.338,50.357 56.29,50.927 63.622,51.225 61.935,52.798 32.911,53.405 56.408,53.44 32.911,53.965 63.932,56.663 59.514,56.692 59.017,64.199 57.819,67.884 60.447,67.909 60.432,68.757 36.596,69.675 60.102,72.485 60.101,73.788 57.81,73.818 35.499,74.077 34.209,74.093 41.032,84.555 41.714,84.555 59.109,84.555 58.706,86.286 39.827,89.502 43.202,89.502 45.61,89.502 48.002,89.502 50.41,89.502 52.81,89.502 55.201,89.502 56.401,89.502 56.995,89.502 58.797,89.502 59.437,89.502 60.039,89.502 60.612,89.502 61.59,89.502
  other v2: 64.87,3.738 67.67,3.738 70.07,3.738 72.87,3.738 15.016,4.936 20.143,5.124 68.09,5.121 15.569,6.858 20.842,6.998 12.551,7.516 18.745,7.794 13.373,7.814 69.347,8.351 18.975,8.454 15.966,8.818 20.537,8.974 67.785,9.001 24.391,9.318 69.347,10.351 15.569,10.778 20.537,10.974 67.785,11.001 14.008,11.783 24.391,12.205 69.347,12.351 17.008,12.618 15.569,12.778 18.569,12.816 20.537,12.974 67.785,13.001 14.008,13.783 69.347,14.351 17.008,14.618 15.569,14.778 18.569,14.816 24.391,14.905 20.537,14.974 6.906,15.221 67.23,15.558 14.008,15.783 69.347,16.351 17.008,16.618 18.569,16.816 6.924,16.933 20.537,16.974 71.368,17.491 14.008,17.783 69.347,18.351 17.008,18.618 18.569,18.816 20.537,18.974 14.008,19.783 46.679,33.412 16.113,47.353 4.979,66.066 6.727,66.066 16.155,66.195 5.017,67.962 75.427,73.392 70.594,73.954 12.754,76.212 5.111,76.833 70.605,77.596 5.151,80.195 70.605,81.88 70.605,86.649 10.48,89.027 70.578,91.309 17.622,92.892 16.179,94.347 17.674,94.346 66.247,94.635 23.361,94.719 29.615,94.72 39,94.72 47.447,94.72 56.748,94.749
  other v3: 12.064,31.756
GND_PULLDOWN: GP0.1 GP1.1 R49.2 U8.4 U8.5 U8.6 U8.7 | length 44.5
  Top Layer w0.18: v3(11.15,27.935) 11.365,27.935 ; 11.446,28.111 U8.5@12.413,28.111 ; U8.7@12.413,27.311 11.365,27.311 11.365,27.711 ; U8.6@12.413,27.711 11.365,27.711 ; U8.4@12.413,28.511 11.365,28.511 11.365,27.935 ; 11.365,27.711 11.365,27.935
  Bottom Layer w0.18: GP0.1@9.96,51.949 GP0.1@9.986,51.923 ; GP1.1@10.609,54.996 10.609,51.975 GP0.1@10.583,51.949 ; v3(11.15,27.935) 7.585,27.935 3.921,31.599 3.921,45.755 5.302,47.135 8.05,47.135 9.112,48.197 9.112,50.478 GP0.1@10.583,51.949 ; R49.2@12.935,51.923 10.609,51.923 GP0.1@10.583,51.949
GPIO0: RN5.2 U8.17 | length 14
  Top Layer w0.18: RN5.2@8.622,34.529 8.622,25.183 10.618,23.187 11.485,23.187 11.609,23.311 U8.17@12.413,23.311
GPIO0_2: GP0.2 pad.2@8.62,37.746 RN5.15 | length 23
  Top Layer w0.18: GP0.2@8.043,51.949 6.47,50.376 4.755,50.376 3.781,49.402 3.781,38.845 4.28,38.346 8.257,38.346 8.622,37.981 RN5.15@8.622,36.029
GPIO1: RN5.1 U8.18 | length 14.6
  Top Layer w0.18: RN5.1@8.035,34.529 8.035,25.372 10.501,22.905 12.408,22.905 U8.18@12.413,22.911
GPIO1_2: GP1.2 pad.2@8.029,37.05 RN5.16 | length 26.2
  Top Layer w0.18: RN5.16@8.035,36.029 8.035,37.924 7.893,38.065 4.164,38.065 3.5,38.729 3.5,38.934 3.49,38.944 3.49,52.501 4.431,53.442 6.515,53.442 GP1.2@8.069,54.996
ICE_CDONE: LED5.1 pad.2@76.669,37.97 R26.2 RN2.15 U5.65 | length 43.7
  Top Layer w0.254: v1(46.397,42.676) 47.103,41.97 U5.65@47.103,40.601 LED5.1@47.103,36.8 ; v1(76.22,40.274) 76.681,39.813 RN2.15@76.681,37.288
  Bottom Layer w0.254: R26.2@44.454,44.959 44.454,44.934 46.35,43.038 46.35,42.723 v1(46.397,42.676) 46.397,41.889 48.036,40.25 v1@76.22,40.25
ICE_CLK: R13.2 U5.52 | length 33.3
  Top Layer w0.254: v1@40.603,39.238 U5.52@40.603,40.601 ; v1@55.933,18.761 R13.2@57.1,18.761
  Bottom Layer w0.254: v1@40.582,39.28 40.582,28.545 45.771,23.356 52.552,23.356 55.848,20.06 v1(55.848,18.771)
  other v1: 40.585,39.238
ICE_CREST: pad.2@75.959,38.433 R27.2 RN2.16 U5.66 | length 36.4
  Top Layer w0.254: U5.66@47.603,40.601 47.605,40.603 47.605,42.679 v1(47.619,42.693) ; v1@74.896,40.776 75.999,39.673 RN2.16@75.999,37.332
  Bottom Layer w0.254: R27.2@47.502,44.664 R27.2@47.619,44.781 ; R27.2@47.613,44.86 R27.2@47.619,44.854 ; R27.2@47.619,44.86 R27.2@47.619,44.854 ; v1@74.749,40.78 49.532,40.78 v1(47.619,42.693) R27.2@47.619,44.781 ; R27.2@47.619,44.781 R27.2@47.619,44.854 ; R27.2@47.619,44.781 47.656,44.817 R27.2@47.619,44.854
  other v1: 74.883,40.764
ICE_Debug0: pad.1@71.682,56.563 R23.1 U5.83 | length 25.9
  Top Layer w0.254: U5.83@52.882,47.459 55.683,47.459 56.785,48.561 65.625,48.561 70.784,53.72 70.784,55.878 pad.1@71.489,56.583 ; pad.1@71.201,56.629 73.44,56.629 73.48,56.629 R23.1@73.487,56.622
ICE_Debug1: pad.1@71.682,58.755 R22.1 U5.84 | length 26.5
  Top Layer w0.254: U5.84@52.945,47.951 55.357,47.951 56.492,49.086 65.244,49.086 69.99,53.832 69.99,57.063 pad.1@71.682,58.755 ; pad.1@72.086,58.509 73.238,58.509 R22.1@73.429,58.7
ICE_Debug2: pad.1@71.736,60.943 R21.1 U5.85 | length 29.3
  Top Layer w0.254: U5.85@52.848,48.45 55.106,48.45 56.298,49.642 65.005,49.642 69.395,54.032 69.395,58.678 pad.1@71.555,60.838 ; pad.1@71.923,60.374 71.488,60.374 72.165,61.051 R21.1@73.493,61.051